# Altium PCB PCB.PcbDoc
Units mm, origin at the board's own origin, x right, y up, seen from the top; angles counter-clockwise.
Board outline 52 x 43.5 mm, 4 copper layers (Top Copper, Signal Layer 1, Signal Layer 2, Bottom Copper), stack 1.57 mm thick; 27 components, 30 nets, 106 pads, 313 vias.
Unrouted connection lines stored in the file: 5.
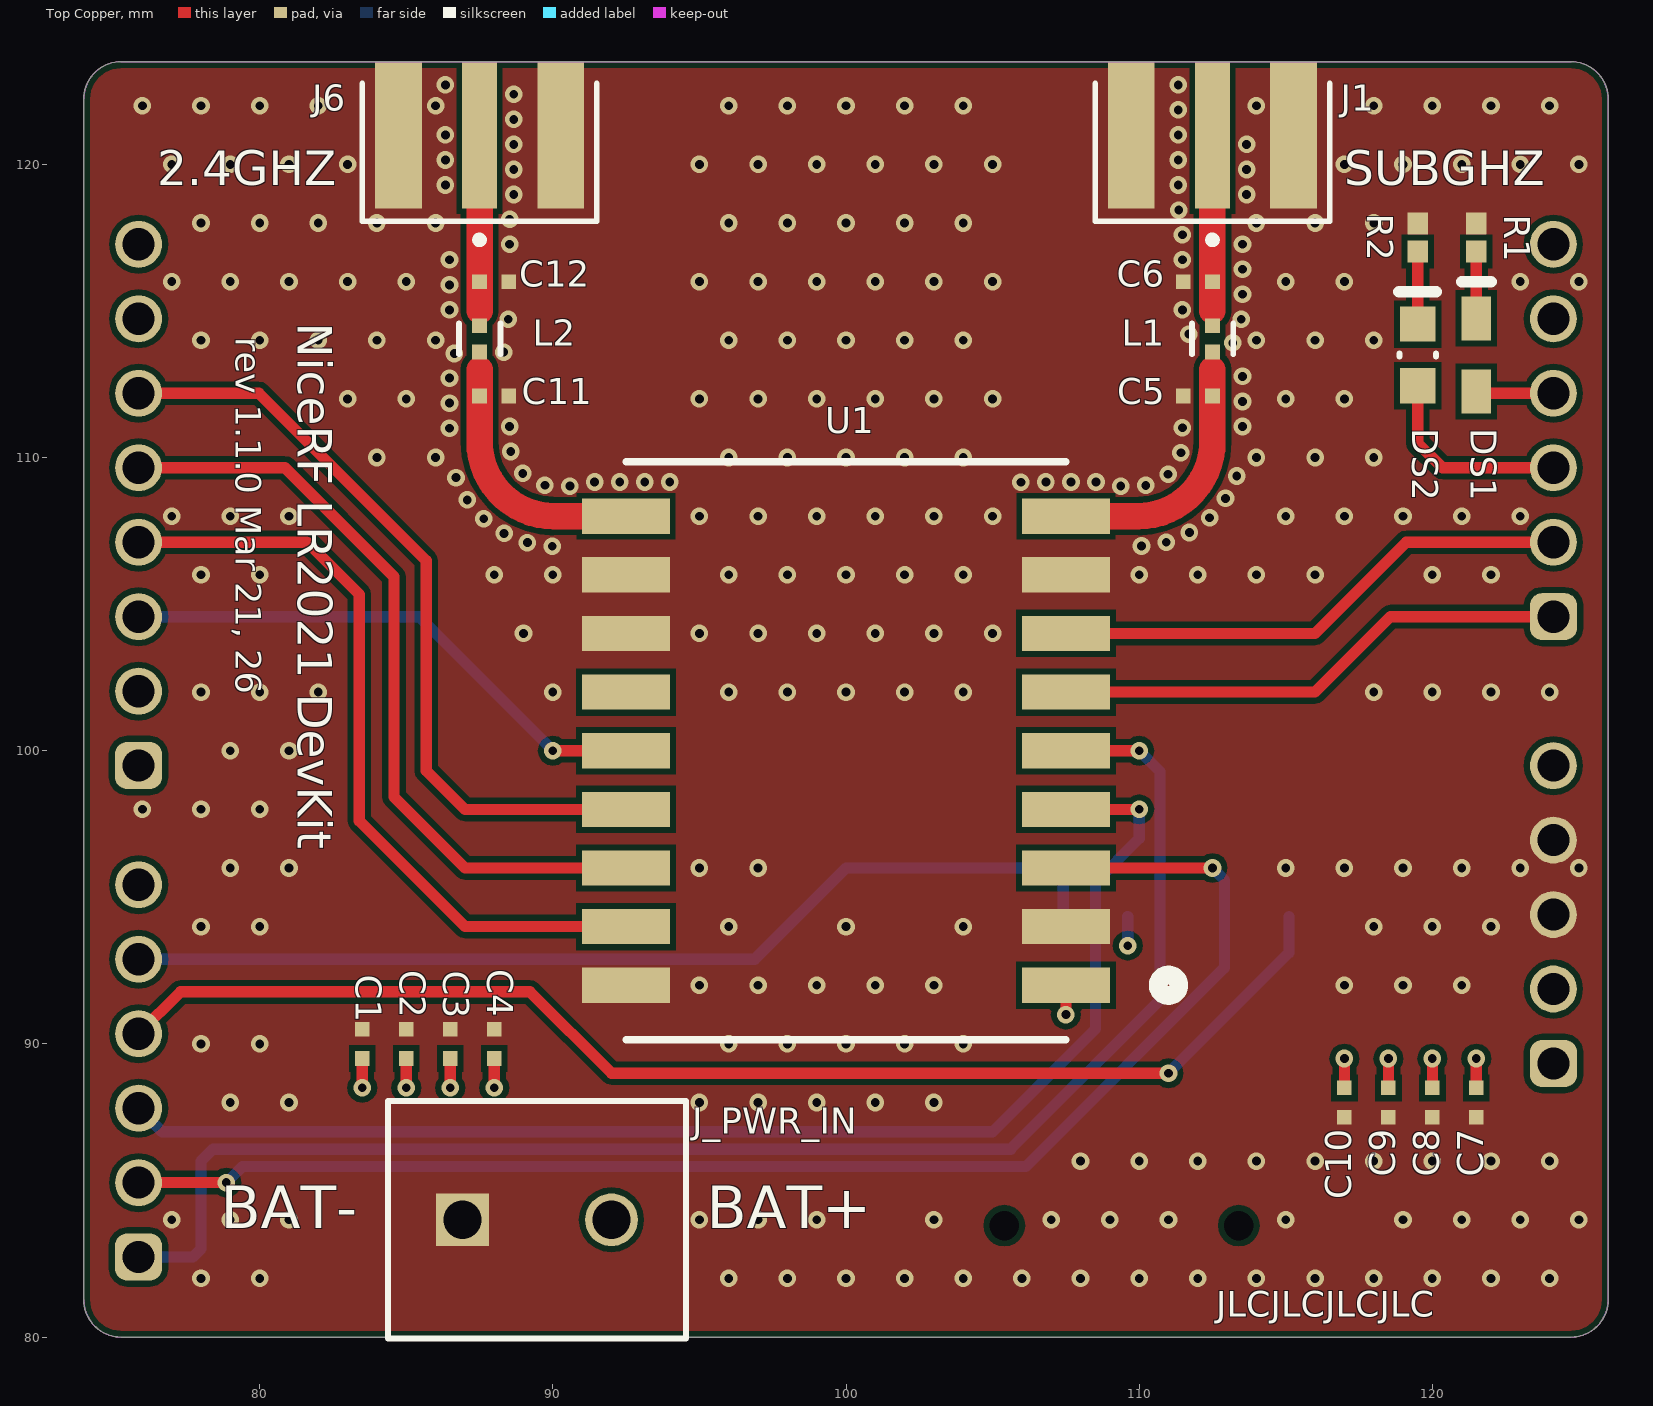
[diagram p0: Top Copper view]
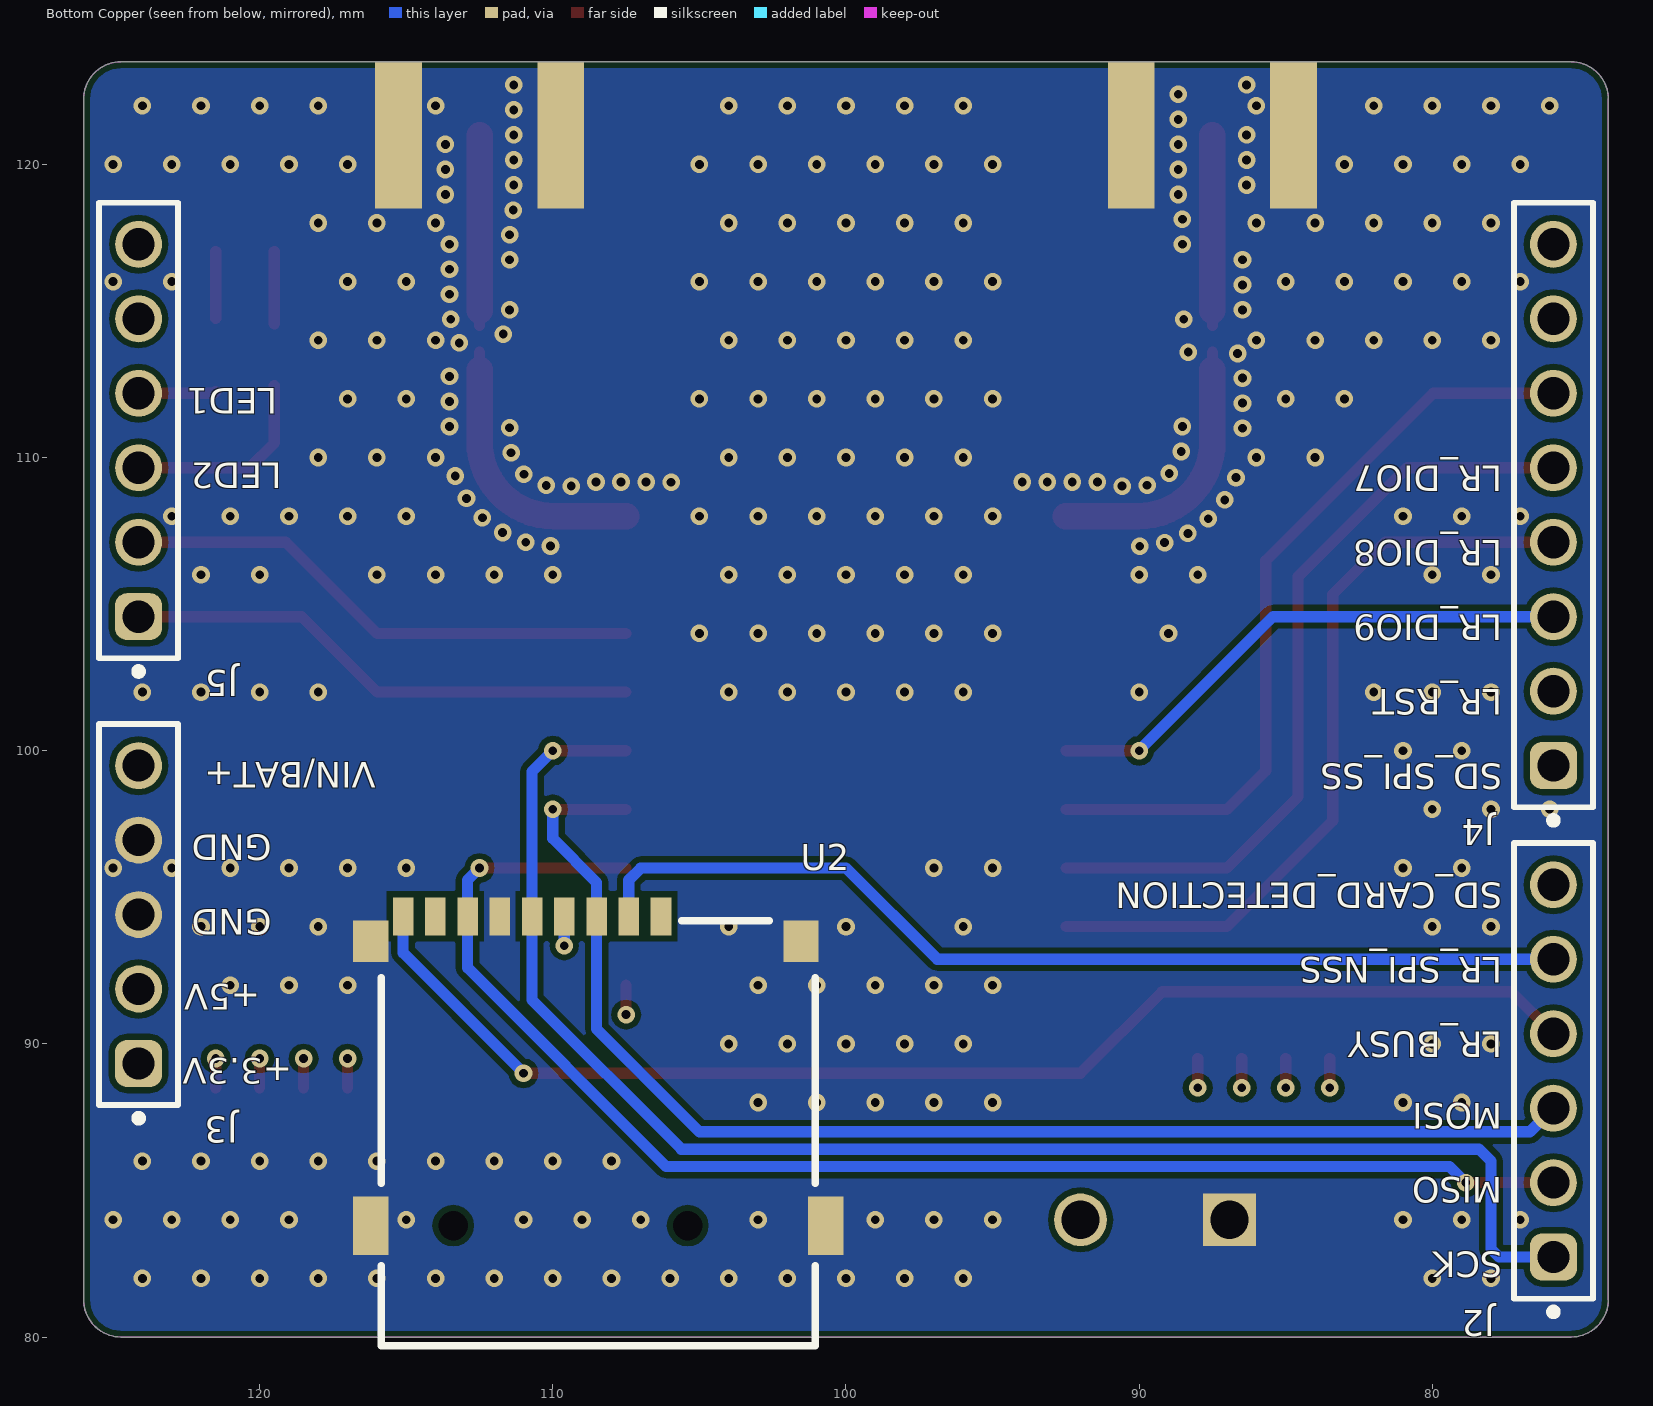
[diagram p1: Bottom Copper view, seen from below]
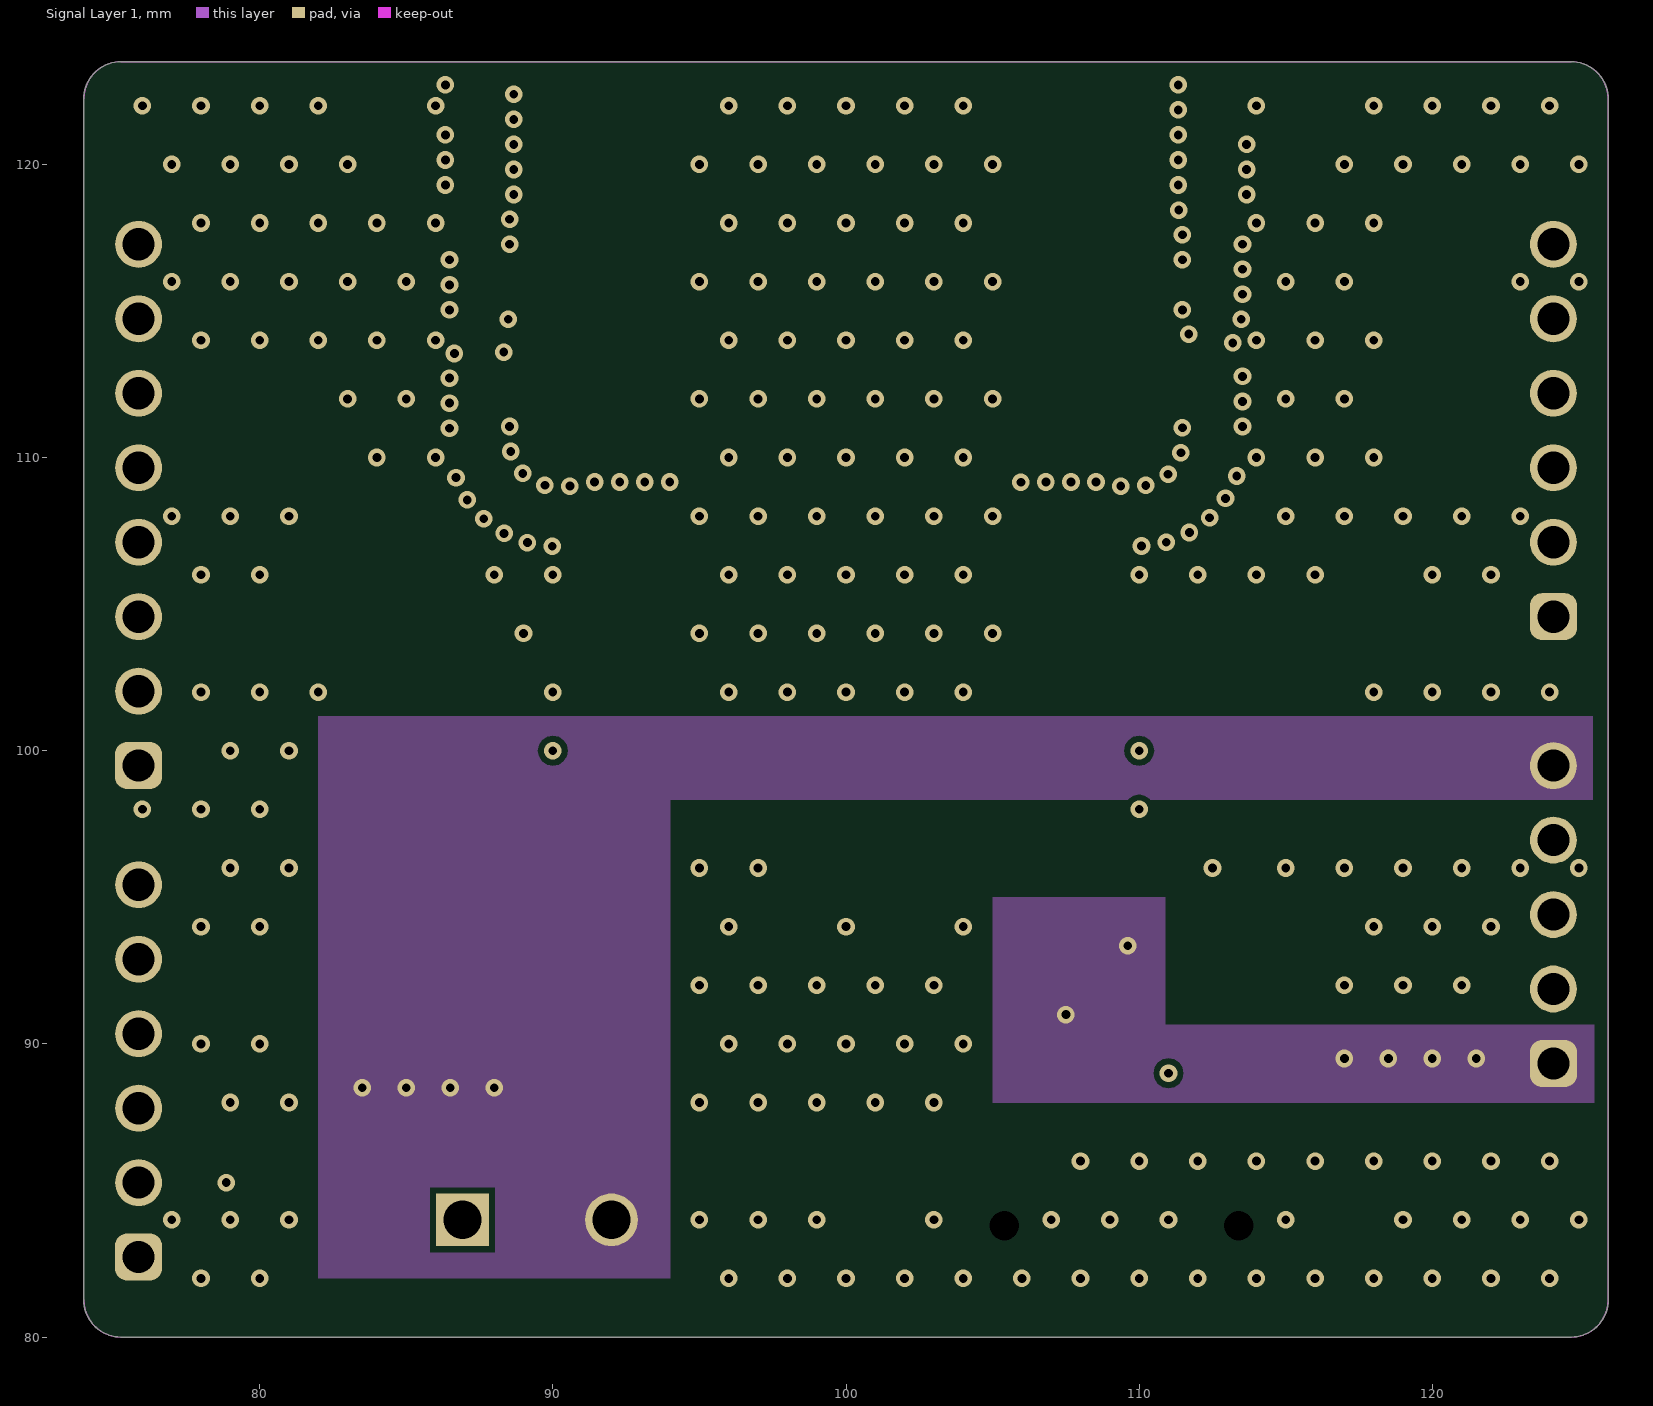
[diagram p2: Signal Layer 1]
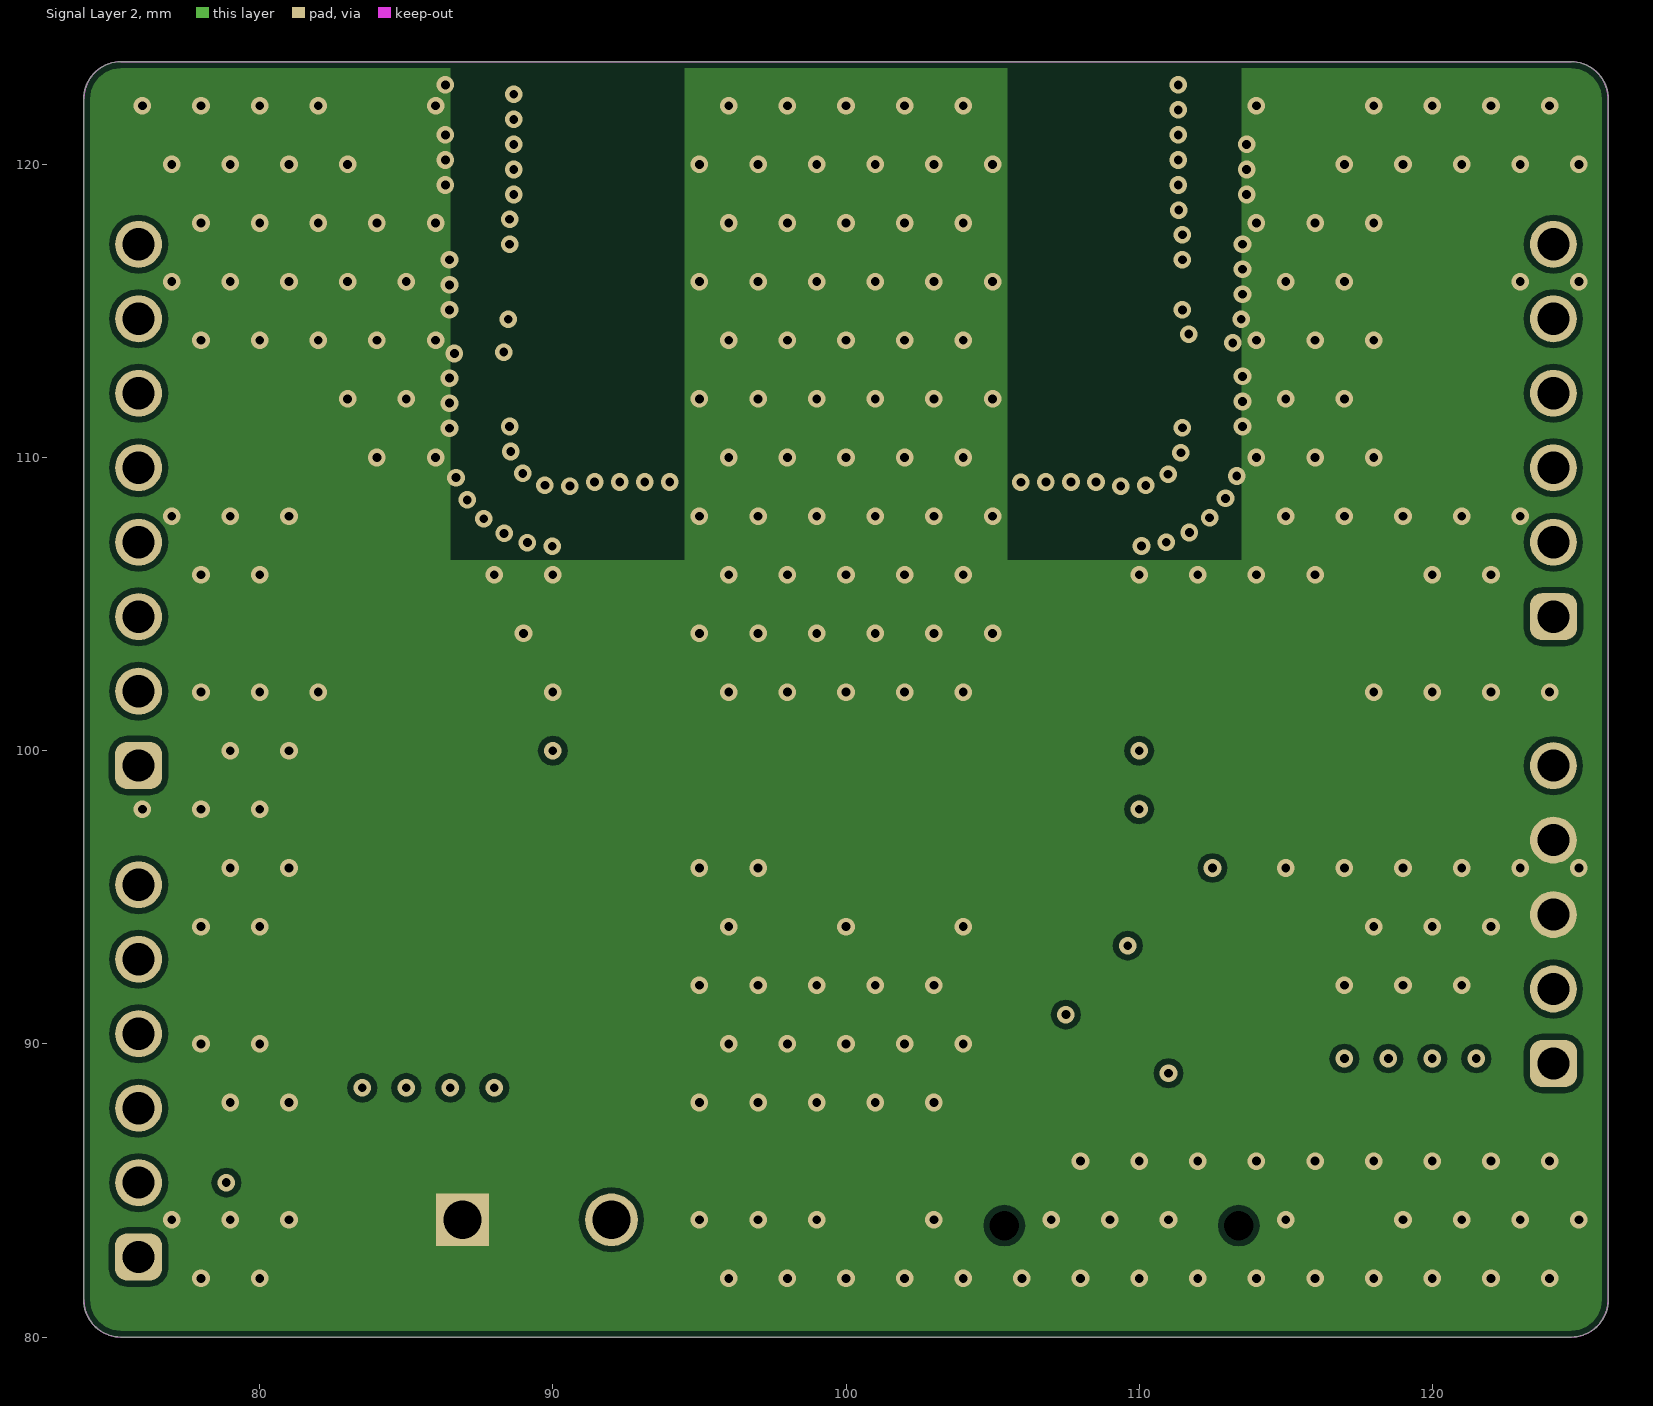
[diagram p3: Signal Layer 2]
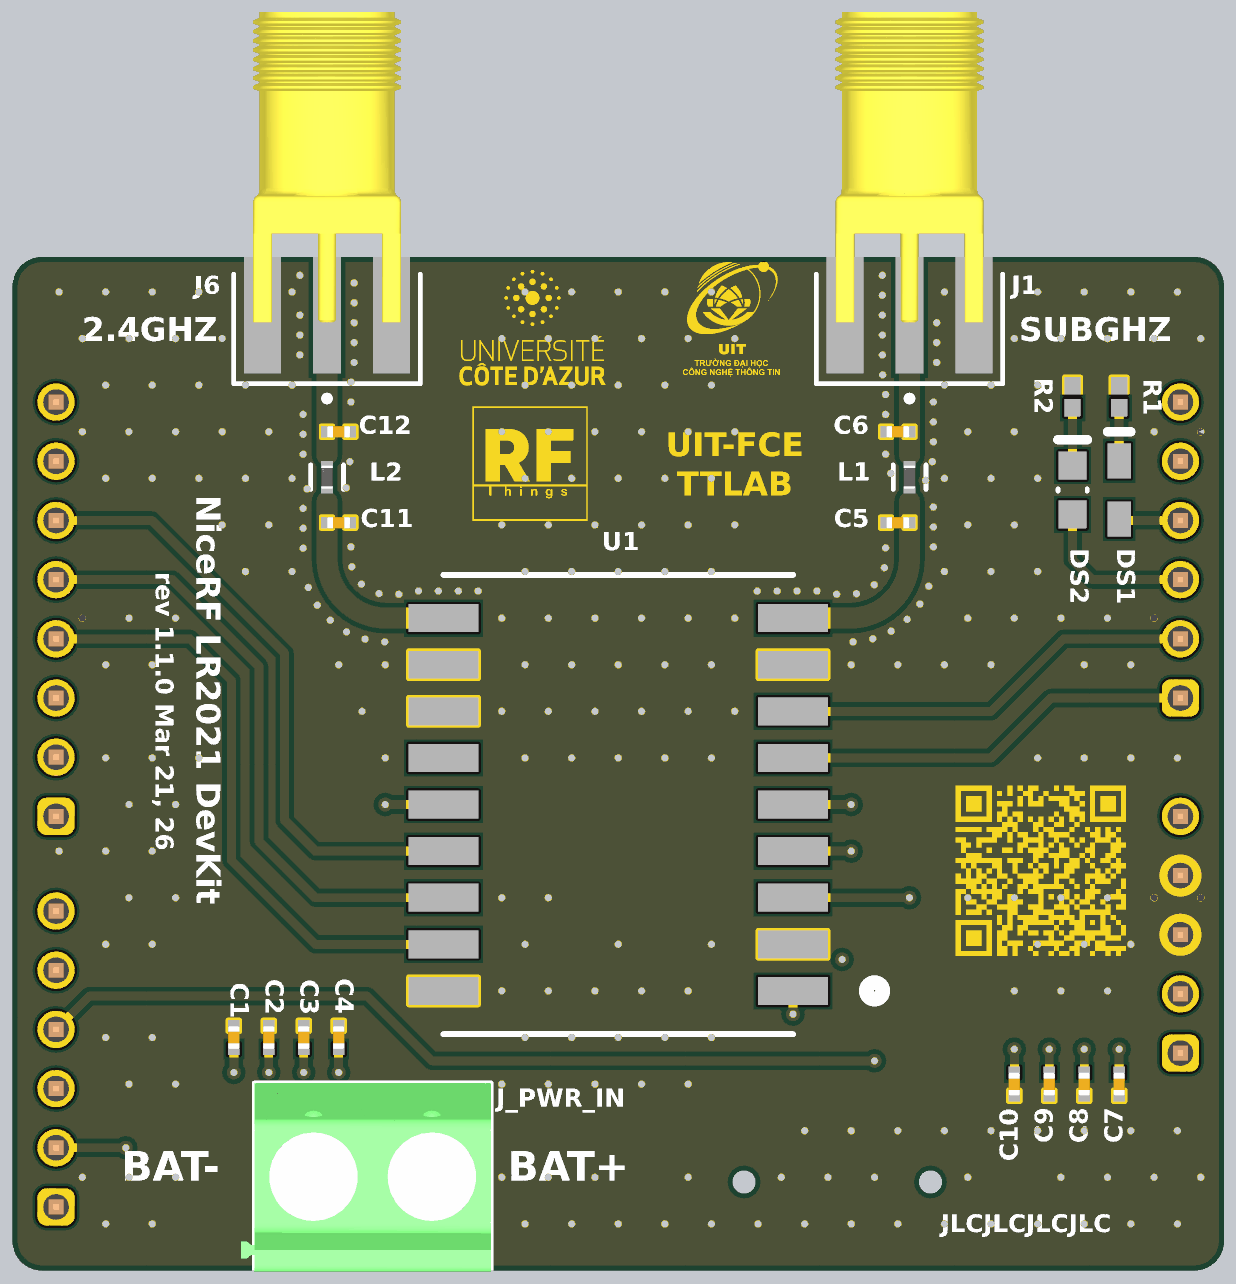
[diagram p4: 3D render of the assembled board from above, using the file's embedded part models]
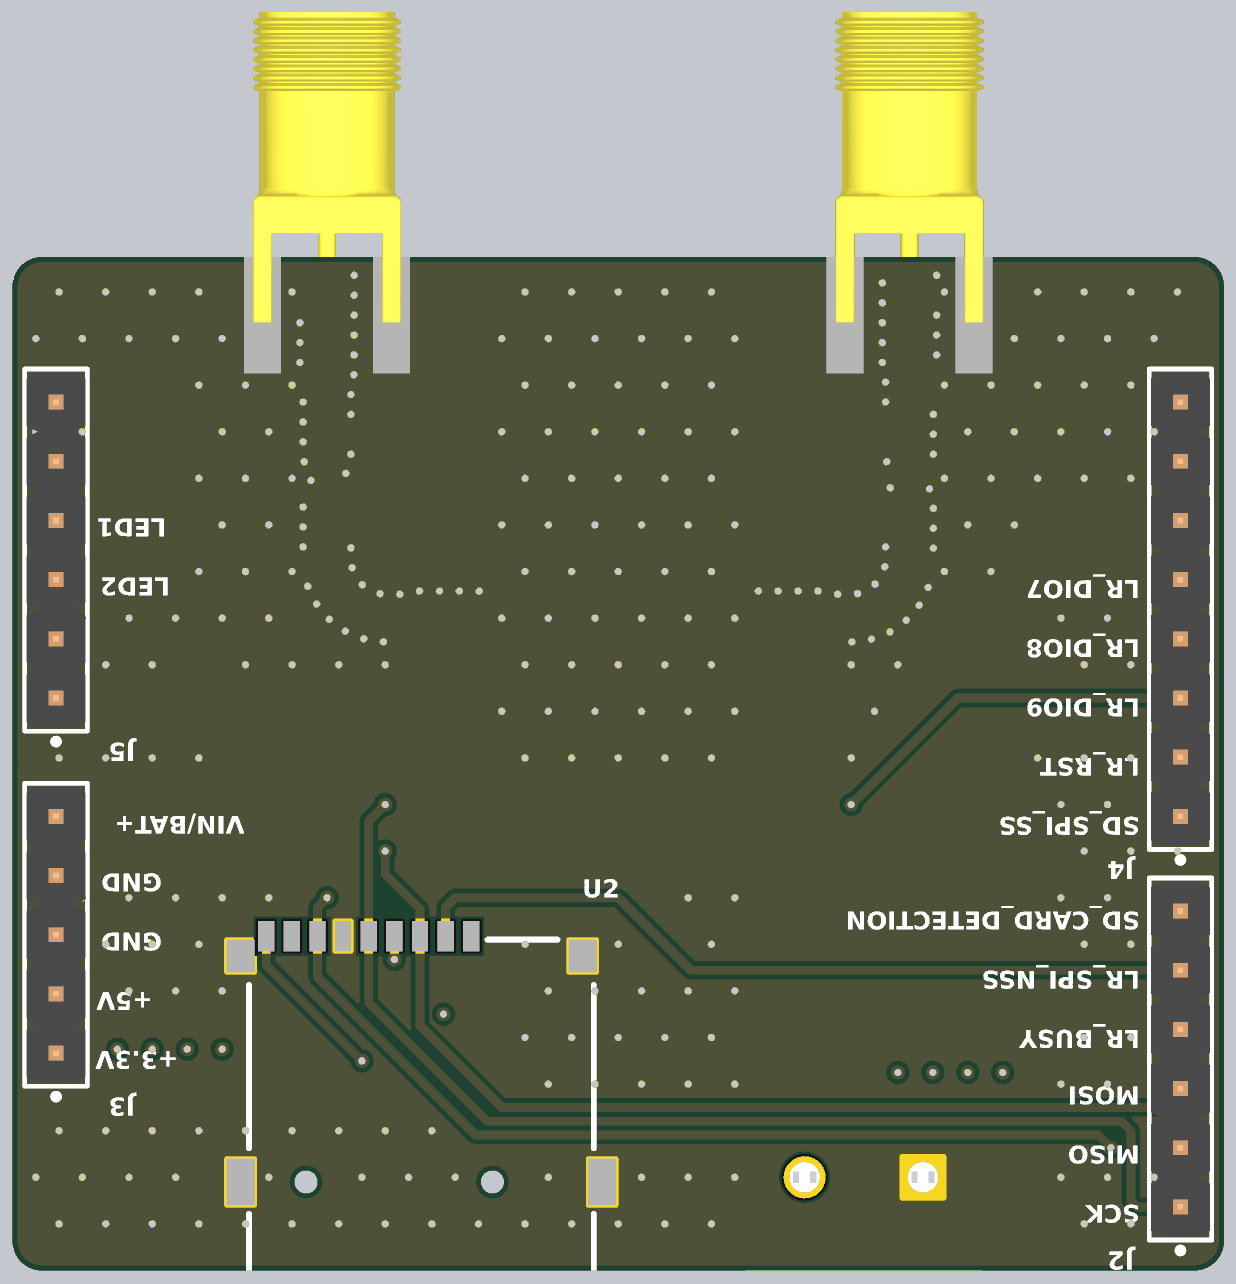
[diagram p5: 3D render of the assembled board from below, using the file's embedded part models]

## Layer stack, top to bottom
Top Mask: solder mask 0.015, Solder Resist, Dk 3.8
Top Copper: signal copper 0.035
Dielectric 1: prepreg 0.2, 7628, Dk 4.6
Signal Layer 1: signal copper 0.0175
Core: core 1.065, FR-4, Dk 4.5
Signal Layer 2: signal copper 0.0175
Dielectric 2: prepreg 0.2, 7628, Dk 4.6
Bottom Copper: signal copper 0.035
Bottom Mask: solder mask 0.015, Solder Resist, Dk 3.8

## Board outline
75.27,80 cw(c75.27,81.27) 74,81.27 74,122.23 cw(c75.27,122.23) 75.27,123.5 124.73,123.5 cw(c124.73,122.23) 126,122.23 126,81.27 cw(c124.73,81.27) 124.73,80

## Design rules (kind name [scope] priority, off if disabled: settings)
BoardOutlineClearance [All] p1: gap=0.2 ignorepadtopadclearanceinfootprint=FALSE except(0.4: Arc-SplitBarrior Arc-SplitContinuation Track-SplitBarrior Track-SplitContinuation SMDPad-SplitBarrior SMDPad-SplitContinuation THPad-SplitBarrior THPad-SplitContinuation Via-SplitBarrior Via-SplitContinuation Fill-SplitBarrior Fill-SplitContinuation Poly-SplitBarrior Poly-SplitContinuation Region-SplitBarrior Region-SplitContinuation Text-SplitBarrior Text-SplitContinuation)
Clearance [All] p1: gap=0.2 ignorepadtopadclearanceinfootprint=FALSE except(0.089: Arc-Arc Arc-Track Arc-SMDPad Track-Track Track-SMDPad SMDPad-SMDPad; 0.127: Arc-Via Track-Via SMDPad-Via THPad-Via Via-Via; 0.254: Arc-Text Track-Text SMDPad-Text THPad-Text Via-Text Fill-Text Poly-Text Region-Text Text-Text)
HoleSize [All] p1: absolutevalues=TRUE maxlimit=6.3 minlimit=0.2 maxpercent=80.000 minpercent=20.000
MinimumAnnularRing [All] p1: minimumring=0.076
MinimumSolderMaskSliver [All] p1: minsoldermaskwidth=0.1
PolygonConnect PolygonConnect_1 [All] p1: connectstyle=Direct reliefconductorwidth=0.508 reliefentries=4 polygonreliefangle="90 Angle" airgapwidth=0.254
RoutingCorners [All] p1: cornerstyle=Round minsetback=2.54 maxsetback=2.54
RoutingVias [All] p1: holewidth=0.5 width=1 viastyle="Through Hole" minholewidth=0.2 minwidth=0.45 maxholewidth=1 maxwidth=2
SilkToSilkClearance [All] p1: silktosilkclearance=0.1
SilkToSolderMaskClearance [IsPad] p1: minsilkscreentomaskgap=0.1 clearancetoexposedcopper=TRUE
SolderMaskExpansion [All] p1: expansion=0.102 istentingtop=FALSE
SupplyNets "Schematic Supply Nets_3" [InNet('+5V')] p1: voltage=0.000
SupplyNets "Schematic Supply Nets_2" [InNet('VIN')] p2: voltage=0.000
SupplyNets "Schematic Supply Nets_1" [InNet('GND')] p3: voltage=0.000
SupplyNets "Schematic Supply Nets" [InNet('+3.3V')] p4: voltage=0.000
Width [All] p1: maxlimit=2.54 minlimit=0.089 preferedwidth=0.381
25 further rules are at their usual default settings.

## Components (designator, comment, footprint, x,y, rotation, side; value= is the part's Value field where it differs from the comment)
C1 "885012205037" WCAP-CSGP_0402_L1W0.5H0.5 83.5,90 r270 top
C2 "885012205037" WCAP-CSGP_0402_L1W0.5H0.5 85,90 r270 top
C3 "885012205037" WCAP-CSGP_0402_L1W0.5H0.5 86.5,90 r270 top
C4 "885012205037" WCAP-CSGP_0402_L1W0.5H0.5 88,90 r270 top
C5 "885012205037" WCAP-CSGP_0402_L1W0.5H0.5 112,112.1 r0 top
C6 "885012205037" WCAP-CSGP_0402_L1W0.5H0.5 112,116 r0 top
C7 "885012205037" WCAP-CSGP_0402_L1W0.5H0.5 121.5,88 r90 top
C8 "885012205037" WCAP-CSGP_0402_L1W0.5H0.5 120,88 r90 top
C9 "885012205037" WCAP-CSGP_0402_L1W0.5H0.5 118.5,88 r90 top
C10 "885012205037" WCAP-CSGP_0402_L1W0.5H0.5 117,88 r90 top
C11 "885012205037" WCAP-CSGP_0402_L1W0.5H0.5 88,112.1 r180 top
C12 "885012205037" WCAP-CSGP_0402_L1W0.5H0.5 88,116 r180 top
DS1 "LTST-S220GKT" LTST-S220GKT_V 121.5,113.5 r90 top
DS2 "LTST-C170KRKT" LTST-C170KRKT_V 119.5,113.5 r90 top
J1 "CON-SMA-EDGE-S" FP-CON-SMA-EDGE-S-MFG 112.5,128.26 r0 top
J2 "61300611121" 61300611121 75.87,89.078 r90 bottom
J3 "61300511121" 61300511121 124.13,94.412 r90 bottom
J4 "61300811121" 61300811121 75.87,108.382 r90 bottom
J5 "61300611121" 61300611121 124.13,110.922 r90 bottom
J6 "CON-SMA-EDGE-S" FP-CON-SMA-EDGE-S-MFG 87.5,128.26 r0 top
J_PWR_IN "1729128" PHOE-1729128-2_V 89.46,84 r0 top
L1 "MLZ1005M1R0WT000" FP-MLZ1005-MFG 112.5,114.05 r90 top
L2 "MLZ1005M1R0WT000" FP-MLZ1005-MFG 87.5,114.05 r90 top
R1 "RT0402DRE071KL" RESC1005X35X25ML10T10 121.5,117.5 r270 top
R2 "RT0402DRE071KL" RESC1005X35X25ML10T10 119.5,117.5 r270 top
U1 "LoRa Module" LR2021 100,100 r180 top
U2 "MicroSD Slot" TF-01A 115.11,95 r180 bottom

## Footprints (in the part's own frame and the unit in brackets; to place one, negate y for a bottom-side part, rotate by r counter-clockwise, add the part's x,y. Pads: shape width x height; smd on the part's side, far side on the other; paste and mask are expansions set on the pad)
61300511121 [mm] "Pin Header, pitch 2.54 mm, THT, Vertical, single row, 5p"
  rrect50% 1.6x1.6 hole 1.1: 1(-5.08,0)
  round 1.6 hole 1.1: 2(-2.54,0) 3(0,0) 4(2.54,0) 5(5.08,0)
  silkscreen extent -7.07,-1.35 6.5,1.35, body extent -6.35,-1.27 6.35,1.27, height 8.57
61300611121 [mm] "Pin Header, pitch 2.54 mm, THT, Vertical, single row, 6p"
  rrect50% 1.6x1.6 hole 1.1: 1(-6.35,0)
  round 1.6 hole 1.1: 2(-3.81,0) 3(-1.27,0) 4(1.27,0) 5(3.81,0) 6(6.35,0)
  silkscreen extent -8.34,-1.35 7.77,1.35, body extent -7.62,-1.27 7.62,1.27, height 8.57
61300811121 [mm] "Pin Header, pitch 2.54 mm, THT, Vertical, single row, 8p"
  rrect50% 1.6x1.6 hole 1.1: 1(-8.89,0)
  round 1.6 hole 1.1: 2(-6.35,0) 3(-3.81,0) 4(-1.27,0) 5(1.27,0) 6(3.81,0) 7(6.35,0) 8(8.89,0)
  silkscreen extent -10.88,-1.35 10.31,1.35, body extent -10.16,-1.27 10.16,1.27, height 8.57
FP-CON-SMA-EDGE-S-MFG [mm]
  rect 1.2x5 smd paste+0 mask+0: 1(0,-7.26)
  rect 1.6x5 smd paste+0 mask+0: 2(-2.77,-7.26) 3(2.77,-7.26)
  rect 1.6x5 smd far side paste+0 mask+0: 4(-2.77,-7.26) 5(2.77,-7.26)
  silkscreen extent -4,-10.96 4,-5.5, body extent -3.67,-9.86 3.67,4.86, height 0.25
FP-MLZ1005-MFG [mm]
  rect 0.5x0.5 smd paste+0 mask+0: 1(-0.45,0) 2(0.45,0)
  silkscreen extent -0.53,-0.71 0.53,0.7, body extent -0.8,-0.38 0.8,0.38, height 0.25
LR2021 [mm] "LoRa2021: 160mW Multi-Band Wireless Communication Module"
  rect 3x1.2 smd: 1(-7.5,8) 2(-7.5,6) 3(-7.5,4) 4(-7.5,2) 5(-7.5,0) 6(-7.5,-2) 7(-7.5,-4) 8(-7.5,-6) 9(-7.5,-8) 10(7.5,-8) 11(7.5,-6) 12(7.5,-4) 13(7.5,-2) 14(7.5,0) 15(7.5,2) 16(7.5,4) 17(7.5,6) 18(7.5,8)
  silkscreen extent -11.35,-9.86 7.5,9.86
LTST-C170KRKT_V [mm] "SMD, 2-Leads, Body 2x1.25mm"
  rect 1.2x1.2 smd: 1(-1.05,0) 2(1.05,0)
  silkscreen extent -0.05,-0.63 2.16,0.64, body extent -1,-0.63 1,0.63, height 1.2
LTST-S220GKT_V [mm] "SMD, 2-Leads, Body 2.1x0.6mm"
  rect 1.5x1 smd: 1(-1.25,0) 2(1.25,0)
  silkscreen extent 2.5,-0.5 2.5,0.5, body extent -1.05,-0.3 1.05,0.3, height 1.1
PHOE-1729128-2_V [mm] "Receptacle, 2-Leads, Body 8.1x10.16mm, Pitch 5.08mm"
  rect 1.8x1.8 hole 1.3: 1(-2.54,0)
  round 1.8 hole 1.3: 2(2.54,0)
  silkscreen extent -5.08,-4.05 5.08,4.05, body extent -5.65,-4.05 5.08,4.05, height 10.01
RESC1005X35X25ML10T10 [mm] "Chip Resistor, 2-Leads, Body 1.00x0.50mm, IPC Low Density"
  rect 0.75x0.7 smd: 1(-0.475,0) 2(0.475,0)
  body extent -0.55,-0.3 0.55,0.3, height 0.35
TF-01A [mm]
  rect 0.7x1.3 smd: 1(8.8,-0.65) 2(7.7,-0.65) 3(6.6,-0.65) 4(5.5,-0.65) 5(4.4,-0.65) 6(3.3,-0.65) 7(2.2,-0.65) 8(1.1,-0.65) 9(0,-0.65)
  rect 1.2x1.4 smd: 10(-1.1,-1.5) 13(13.58,-1.5)
  rect 1.2x2 smd: 11(-1.1,-11.2) 12(14.42,-11.2)
  rect 0x0 hole 1 unplated: 14(1.71,-11.2) 15(9.71,-11.2)
  silkscreen extent -0.74,-15.3 14.06,-0.8
WCAP-CSGP_0402_L1W0.5H0.5 [mm] "Ceramic Capacitors, body 1x0.5mm"
  rect 0.5x0.5 smd: 1(-0.5,0) 2(0.5,0)
  body extent -0.5,-0.25 0.5,0.25, height 0.5

## Part data
C1 C2 C3 C4 C5 C6 C7 C8 C9 C10 C11 C12: library part CMP-207839-000001-3, "Cap Ceramic 0.1uF 16V X7R 10% Pad SMD 0402 125C T/R", Capacitance=100nF, Case Code (Imperial)=0402, Case Code (Metric)=1005, Dielectric=X7R, Insulation Resistance=5GΩ, Max Operating Temperature=125°C, Min Operating Temperature=-55°C, Tolerance=10%, Voltage Rating=16V, Case/Package=0402, Height=500µm, Length=1mm, Material=Ceramic, Mount="Surface Mount", REACH SVHC=Unknown, RoHS=Compliant, Thickness=558.8µm, Voltage Rating (DC)=16V, Width=500µm
DS1: library part CMP-2000-06627-1, "LED Green, 100 mW, 30 mA, -55 to 85 degC, 2-Pin SMD, RoHS, Tape and Reel", Emitting Color=YellowGreen, Forward Current=30mA, Forward Voltage=2.6V, Manufacturer=Lite-On, Operating Temp Range=-55Cto85C, Operating Temperature Classification=Industrial, Package Description="2-Pin Surface Mount Device, Body 2.1 x 0.6 mm", Package Reference=S220GKT, Package Type=SMD, Power Dissipation=100W, Reverse Voltage=5V, Test Current (It)=20mA, Datasheet URL=http://media.digikey.com/pdf/Data%20Sheets/Lite-On%20PDFs/LTST-S220GKT.pdf, Datasheet Version=03/2000, DELETED=Compliant, Dominant Wave Length=569nm, High Brightness=No, Lens Dimensions=1.7x0.6x0.5mm, Lum Intensity=20mcd, Luminous Intensity=20mcd, Main Category=ChipLED, Manufacturer URL=http://www.us.liteon.com/, Mounting=SurfaceMount, Mounting Technology=SurfaceMount, Number of  Elements=1, Packaging=TapeandReel, Peak Wavelength=565nm, Pin Count=2, Product Depth (mm)=0.6mm, Product Height (mm)=1mm, Product Length (mm)=2.1mm, Rad Hardened=No, Shape Type=Rectangular, Type=Uni-Color, Viewing Angle=130deg
DS2: library part CMP-2000-07593-1, "LED Red, 75 mW, 54 mcd, -55 to 85 degC, 2-Pin SMD, RoHS, Tape and Reel", Case Code (Imperial)=0805, Case Code (Metric)=2012, Colour=Red, Forward Current=30mA, Forward Voltage=2V, Lens Colour=Colorless, Manufacturer=Lite-On, Max Operating Temperature=85degC, Min Operating Temperature=-55degC, Package Description="2-Pin Surface Mount Device, Body 2 x 1.25 mm", Package Quantity=1, Package Reference=C170KRKT, Power Dissipation=75mW, Test Current=20mA, Case\/Package=0805, Datasheet URL=http://optoelectronics.liteon.com/upload/download/DS-22-99-0150/LTST-C170KRKT.pdf, Datasheet Version="Rev. D, 11/2014", Depth=1.6mm, Dominant Wavelength=631nm, Height=1.1mm, Illumination Colour=Red, Lead Free=LeadFree, Length=3.2mm, Lens Style=Rectangular, Lens Transparency=Clear, Luminous Intensity=54mcd, Manufacturer URL=http://www.us.liteon.com/, Mount=SurfaceMount, Mounting Technology=SurfaceMount, Number of Elements=1, Number of LEDs=1, Number of Pins=2, Packaging=TapeandReel, Power Rating=75mW, Radiation Hardening=No, RoHSCompliant=True, Viewing Angle=130degrees, Wavelength=639nm, Width=1.25mm
J1 J6: library part CMP-204357-000001-1, "CONN SMA JACK STR EDGE MNT", Frequency=18GHz, Manufacturer="RF Solutions Ltd.", Package=CONN_JACK, Automotive=No, Category=Conn, ComponentLink2Description=Datasheet, ComponentLink2URL=https://www.rfsolutions.co.uk/downloads/1498648656DS-CON-EDGE-SMA-4.pdf, Conn Orientation="Right Angle", Contact Material=Gold, Device Class L1=Connectors, Device Class L2="RF / Coaxial Connectors", Device Class L3=unset, Digikey Description="CONN SMA JACK STR EDGE MNT", Footprint Url=https://forum.upverter.com/uploads/default/original/3X/b/e/be75b907af57498775929d6d9099689c472e0307.pdf, Height=6.35mm, Impedance=50Ω, Is Female=yes, Lead Free=Yes, Manufacturer Part Number=CON-SMA-EDGE-S, Number Of Contacts=1, Octopart=https://octopart.com/con-sma-edge-s-rf+solutions-70967450, RoHS=TRUE, Shielding=true
J2 J5: library part CMP-1502-01070-4, "THT Vertical Pin Header WR-PHD, Pitch 2.54 mm, Single Row, 6 pins", Color=Black, Contact Resistance=20mΩ, Current Rating=3A, Max Operating Temperature=105°C, Min Operating Temperature=-40°C, Operating Supply Voltage=250V, Connector Type="Male Pin", Contact Gender=Male, Contact Material=Gold, Contact Mating Length=5.9944mm, Contact Plating=Gold, Gender=Male, Height=8.89mm, Housing Material=PBT, Lead Free="Lead Free", Lead Pitch=2.54mm, Mount="Through Hole", Number Of Contacts=6, Number of Pins=6, Number of Positions=6, Number of Rows=1, Orientation=Vertical, Packaging=Bulk, Pitch=2.54mm, RoHS=Compliant, Termination="Through Hole", Voltage Rating=250V
J3: library part CMP-1502-01068-4, "THT Vertical Pin Header WR-PHD, Pitch 2.54 mm, Single Row, 5 pins", Color=Black, Contact Resistance=20mΩ, Current Rating=3A, Max Operating Temperature=105°C, Min Operating Temperature=-40°C, Operating Supply Voltage=250V, Connector Type="Male Pin", Contact Material=Gold, Contact Mating Length=5.9944mm, Contact Plating=Gold, Gender=Male, Height=8.89mm, Lead Free="Lead Free", Lead Pitch=2.54mm, Mount="Through Hole", Number Of Contacts=5, Number of Pins=5, Number of Positions=5, Number of Rows=1, Orientation=Vertical, Packaging=Bulk, Pitch=2.54mm, RoHS=Compliant, Termination=Solder, Voltage Rating=250V
J4: library part CMP-1502-01076-4, "THT Vertical Pin Header WR-PHD, Pitch 2.54 mm, Single Row, 8 pins", Color=Black, Contact Resistance=20mΩ, Current Rating=3A, Max Operating Temperature=105°C, Min Operating Temperature=-40°C, Operating Supply Voltage=250V, Connector Type="Male Pin", Contact Material=Gold, Contact Mating Length=5.9944mm, Contact Plating=Gold, Gender=Male, Height=8.54mm, Lead Pitch=2.54mm, Mount="Through Hole", Number Of Contacts=8, Number of Pins=8, Number of Positions=8, Number of Rows=1, Orientation=Vertical, Packaging=Bulk, Pitch=2.54mm, RoHS=Compliant, Termination=Solder, Voltage Rating=250V
J_PWR_IN: library part CMP-2000-05815-1, "PCB Terminal Block, 13.5 A, 400 V, 2-Pin THD, RoHS, Bulk", Current Rating=13500mA, Manufacturer="Phoenix Contact", Package Description="2-Pin Through Hole Device, Body 8.1 x 10.16 mm, Pitch 5.08 mm", Package Reference=1729128-2, Package Version=03/2015, Voltage Rating=400V, Datasheet URL=https://datasheet.ciiva.com/16046/1729128-16046181.pdf, Datasheet Version=12/2013, Manufacturer URL=http://www.phoenixcontact.com/, Mounting Technology=ThroughHole, No. of Positions=2, No. of Rows=1, Orientation=Horizontal, Package URL=https://www.phoenixcontact.com/online/portal/pi/pxc/product_detail_page/!ut/p/b1/3VdJjqNKFDxLH8AFycySyWY2ozFsEPOMMQaDOX1XedGL_1Vdm5YXJleknhSKeBkvI6EA8ncAo3AYoDhBQGco6KN7VURTdemj9us_IEKEZo_YHiPAEWEFmDGOHMORkqKYCORBZxgL7ZoaZYcbFFUZ3fqxSY6GOuxydWUuHqz1ynmMFygu583Bob0Ewr6Sd_l-5m-kAueHiB0jpRwZwe58wwtkpxtMYd_LmGcDRU02dRNEyWt6Y2ti5pSyJ_reIkzIulrqApdnbT11V5jnCKbYNCvhEM1MCpPByat_X379-iThf08CI5GfOPqfBeS3BRoBOdD55AKVv0iLwCMq-2BrzXWSGRH7pUGD9uwXQjiph3xL0DKQwdGa0JImiIOmBNOestqgwTHSSs2oOep-78apyXQBvNi8ZLaFjvjWvcaUEBu0MC6Wbe-d6mB0FAebo2lUWinqYaZs5DAYzV0RP9yitUjnGJ0iI9xhZkT42OCQNUJJhkgWINNQLP2JFP6OpMg3JCVg70jqHT0lvKOnhHf0lPuOnnLf0VPuWx6_dxwUIvwk5WMkT0kLL1mh61l2yZVSzG3pYV_bqo-mj6uMKwKwdnnW8Jh5RTOJzMOA5c-eJDaZQw4mTMPH02PvS_ZAqNVjVTo2WyYLkwH_KU1mmmG5kjRhDqPXLwwVHvVOjCM60-fpXvTDfMGW1PVFVS1r4e4yVDk4ZdNbkUHvqPqQSeian4UD39fNKmachqdJ1NJbyk8rXT9mXTvPk3oE5meulKGgiruPJek-4I9hTT6G8ZLOyRSm2RRVbThERQad5OS28hdt4YW4vG0stgYYzsWsK4_7y6DZMjJSCqri1kyiZR5vD7pwIrNR7QwPHTcLTI5qT7eRlpHrdGiupYlqQDJ7zy_CND8fWWBoLRXxk1RVcXiBQwbTD4Xi7KL-FuO94t9xaqweXzH, Packing=Bulk, PartNumber=1729128, Pitch=5.08mm, RoHS=TRUE
L1 L2: library part CMP-08253-000219-1, "Shielded Multilayer Inductor 1uH ±20% 450mA 455mΩ SMD 0402", Case Code (Imperial)=0402, Case Code (Metric)=1005, Current Rating=450mA, DC Resistance (DCR)=455mR, Inductance=1uH, Max Operating Temperature=125°C, Min Operating Temperature=-55°C, Package Quantity=10000, Saturation Current=100mA, Self Resonant Frequency=170MHz, Test Frequency=2MHz, Tolerance=20%, Case/Package=0402, Core Material=Ferrite, Height - Seated (Max)=0.022inch, Length=0.039inch, Mount="Surface Mount", Packaging="Tape and Reel", RoHS Compliant=Yes, Shielding=Shielded, Width=0.02inch
R1 R2: library part CMP-2002-02598-1, Manufacturer=Yageo, Part Number=RT0402DRE071KL
U1: library part LR2021, "LoRa2021: 160mW Multi-Band Wireless Communication Module"
U2: library part TF-01A, "1.85mm Card Slot MicroSD card (TF card) Self-bouncing SMD SD Card / Memory Card Connector ROHS"

## Via types
v1: diameter 0.6, hole 0.3, Top Copper to Bottom Copper, tented both sides, 313 vias

## Nets (pads, with @x,y where several pads share a name; then routed paths per layer and width w, separated by ;. In a path a pad name is that pad's centre, name@x,y a point inside that pad or via, vN(x,y) a via of type N, cw(c..) or ccw(c..) an arc to the next point about the centre after c; other vN are vias at no path point)
2.4GHZ_ANT: C11.2 L2.1 U1.10 | length 10.4
  Top Copper w0.381: C11.2 L2.1
  Top Copper w0.904: 87.5,113 87.5,110.54 ccw(c90.04,110.54) 90.04,108 U1.10
+3.3V: C7.2 C8.2 C9.2 C10.2 J3.1 U1.1 U2.4 | length 6
  Top Copper w0.381: v1(107.5,91) U1.1 ; C10.2 v1(117,89.5) ; C9.2 v1(118.5,89.5) ; C8.2 v1(120,89.5) ; C7.2 v1(121.5,89.5)
  Bottom Copper w0.381: v1(109.61,93.35) U2.4
+5V: J3.2
ADR_A0: J5.1 U1.6 | length 17.7
  Top Copper w0.381: U1.6 116,102 118.572,104.572 J5.1
ADR_A1: J5.2 U1.7 | length 17.9
  Top Copper w0.381: U1.7 116,104 119.112,107.112 J5.2
ADR_A2: DS2.1 J5.3 | length 6.9
  Top Copper w0.381: DS2.1 119.5,110.5 120.348,109.652 J5.3
ADR_A3: DS1.1 J5.4 | length 2.7
  Top Copper w0.381: DS1.1 121.558,112.192 J5.4
ADR_A4: J5.5
ADR_A5: J5.6
ADR_D0: J4.8
ADR_D1: J4.7
ADR_D2: J4.6 U1.15 | length 26.7
  Top Copper w0.381: J4.6 79.975,112.192 85.681,106.486 85.681,99.319 87,98 U1.15
ADR_D3: J4.5 U1.16 | length 26.7
  Top Copper w0.381: J4.5 80.862,109.652 84.581,105.933 84.581,98.419 87,96 U1.16
ADR_D4: J4.4 U1.17 | length 26.6
  Top Copper w0.381: J4.4 81.614,107.112 83.398,105.328 83.398,97.602 87,94 U1.17
ADR_D5: J4.3 U1.14 | length 18.5
  Top Copper w0.381: v1(90,100) U1.14
  Bottom Copper w0.381: J4.3 85.428,104.572 v1(90,100)
ADR_D6: J4.2
ADR_D7: J4.1
ADR_D8: J2.6
ADR_D9: J2.5 U2.2 | length 34.2
  Bottom Copper w0.381: J2.5 96.888,92.888 100,96 107,96 107.41,95.59 U2.2
ADR_D10: J2.4 U2.9 | length 43.9
  Top Copper w0.381: J2.4 77.297,91.775 89.225,91.775 92,89 v1(111,89)
  Bottom Copper w0.381: v1(111,89) 115.11,93.11 U2.9
ADR_D11: J2.3 U1.4 U2.3 | length 45
  Top Copper w0.381: U1.4 v1(110,98)
  Bottom Copper w0.381: J2.3 76.678,87 81,87 105,87 108.51,90.51 U2.3 108.51,95.51 110,97 v1(110,98)
ADR_D12: J2.2 U1.3 U2.7 | length 48.6
  Top Copper w0.381: J2.2 v1(78.863,85.268) ; U1.3 v1(112.5,96)
  Bottom Copper w0.381: v1(78.863,85.268) 79.417,85.823 106.134,85.823 112.91,92.598 112.91,93.35 U2.7 112.91,95.59 v1(112.5,96)
ADR_D13: J2.1 U1.5 U2.5 | length 51.5
  Top Copper w0.381: U1.5 v1(110,100)
  Bottom Copper w0.381: J2.1 77.728,82.728 78,83 78,86 78.407,86.407 105.618,86.407 110.71,91.499 110.71,93.35 U2.5 110.71,99.29 v1(110,100)
GND: C1.1 C2.1 C3.1 C4.1 C5.1 C6.1 C7.1 C8.1 C9.1 C10.1 C11.1 C12.1 J1.2 J1.3 J1.4 J1.5 J3.3 J3.4 J6.2 J6.3 J6.4 J6.5 J_PWR_IN.1 R1.1 R2.1 U1.2 U1.8 U1.11 U1.12 U1.18 U2.6 U2.10 U2.11 U2.12 U2.13
  other v1: 78,82 80,82 96,82 98,82 100,82 102,82 104,82 106,82 108,82 110,82 112,82 114,82 116,82 118,82 120,82 122,82 124,82 77,84 79,84 81,84 95,84 97,84 99,84 103,84 107,84 109,84 111,84 115,84 119,84 121,84 123,84 125,84 108,86 110,86 112,86 114,86 116,86 118,86 120,86 122,86 124,86 79,88 81,88 95,88 97,88 99,88 101,88 103,88 78,90 80,90 96,90 98,90 100,90 102,90 104,90 95,92 97,92 99,92 101,92 103,92 117,92 119,92 121,92 78,94 80,94 96,94 100,94 104,94 118,94 120,94 122,94 79,96 81,96 95,96 97,96 115,96 117,96 119,96 121,96 123,96 125,96 76,98 78,98 80,98 79,100 81,100 78,102 80,102 82,102 90,102 96,102 98,102 100,102 102,102 104,102 118,102 120,102 122,102 124,102 89,104 95,104 97,104 99,104 101,104 103,104 105,104 78,106 80,106 88,106 90,106 96,106 98,106 100,106 102,106 104,106 110,106 112,106 114,106 116,106 120,106 122,106 89.977,106.977 110.08,106.982 89.132,107.1 110.924,107.113 88.337,107.412 111.712,107.442 87.643,107.91 112.401,107.947 77,108 79,108 81,108 95,108 97,108 99,108 101,108 103,108 105,108 115,108 117,108 119,108 121,108 123,108 87.084,108.556 112.946,108.604 90.583,109.026 109.371,109.026 110.224,109.048 89.73,109.056 91.426,109.165 92.28,109.165 93.134,109.165 93.988,109.165 105.966,109.158 106.82,109.165 107.674,109.165 108.528,109.165 86.697,109.317 113.325,109.369 110.988,109.43 88.977,109.458 84,110 86,110 96,110 98,110 100,110 102,110 104,110 114,110 116,110 118,110 111.424,110.164 88.563,110.205 86.474,111.002 111.474,111.017 88.526,111.059 113.526,111.059 86.474,111.856 113.526,111.913 83,112 85,112 95,112 97,112 99,112 101,112 103,112 105,112 115,112 117,112 86.474,112.71 113.526,112.767 86.643,113.547 88.324,113.597 113.19,113.912 78,114 80,114 82,114 84,114 86,114 96,114 98,114 100,114 102,114 104,114 114,114 116,114 118,114 111.693,114.21 88.48,114.715 113.48,114.715 86.474,115.035 111.474,115.035 113.526,115.568 86.474,115.889 77,116 79,116 81,116 83,116 85,116 95,116 97,116 99,116 101,116 103,116 105,116 115,116 117,116 123,116 125,116 113.526,116.422 86.474,116.743 111.474,116.743 88.526,117.276 113.526,117.276 111.474,117.597 78,118 80,118 82,118 84,118 86,118 96,118 98,118 100,118 102,118 104,118 114,118 116,118 118,118 88.526,118.13 111.347,118.442 88.665,118.972 113.665,118.972 86.335,119.296 111.335,119.296 88.665,119.826 113.665,119.826 77,120 79,120 81,120 83,120 95,120 97,120 99,120 101,120 103,120 105,120 117,120 119,120 121,120 123,120 125,120 86.335,120.15 111.335,120.15 88.665,120.68 113.665,120.68 86.335,121.004 111.335,121.004 88.665,121.534 111.335,121.858 76,122 78,122 80,122 82,122 86,122 96,122 98,122 100,122 102,122 104,122 114,122 118,122 120,122 122,122 124,122 88.665,122.388 86.335,122.712 111.335,122.712
NetC6_2: C6.2 J1.1 L1.2 | length 7.5
  Top Copper w0.381: L1.2 C6.2
  Top Copper w0.904: 112.5,115 J1.1
NetC12_2: C12.2 J6.1 L2.2 | length 7.5
  Top Copper w0.381: L2.2 C12.2
  Top Copper w0.904: 87.5,115 J6.1
NetDS1_2: DS1.2 R1.2 | length 2.3
  Top Copper w0.381: DS1.2 R1.2
NetDS2_2: DS2.2 R2.2 | length 2.5
  Top Copper w0.381: DS2.2 R2.2
SUBGHZ_ANT: C5.2 L1.1 U1.9 | length 10.4
  Top Copper w0.381: C5.2 L1.1
  Top Copper w0.904: U1.9 109.96,108 ccw(c109.96,110.54) 112.5,110.54 112.5,113
VIN: C1.2 C2.2 C3.2 C4.2 J3.5 J_PWR_IN.2 | length 4
  Top Copper w0.381: v1(83.5,88.5) C1.2 ; v1(85,88.5) C2.2 ; v1(86.5,88.5) C3.2 ; v1(88,88.5) C4.2
pads on no net: U1.13 U2.1 U2.8 U2.14 U2.15

## Polygon pours and split planes (outlines as drawn)
+3.3V on Signal Layer 1 (solid, pour order 5): 105,88 125.526,88 125.526,90.65 110.896,90.65 110.896,95 105,95
VIN on Signal Layer 1 (solid, pour order 6): 82,82 94,82 94,98.323 125.479,98.323 125.479,101.184 82,101.184
GND on Signal Layer 2 "Signal Layer 2-GND" (solid, pour order 4): 74,81.27 74,122.23 cw(c75.27,122.23) 75.27,123.5 124.73,123.5 cw(c124.73,122.23) 126,122.23 126,81.27 cw(c124.73,81.27) 124.73,80 75.27,80 cw(c75.27,81.27)
GND on Bottom Copper "Bottom Copper-GND" (solid, pour order 3): 74,81.27 74,122.23 cw(c75.27,122.23) 75.27,123.5 124.73,123.5 cw(c124.73,122.23) 126,122.23 126,81.27 cw(c124.73,81.27) 124.73,80 75.27,80 cw(c75.27,81.27)
GND on Top Copper "Top Copper-GND" (solid, pour order 0): 74,81.27 74,122.23 cw(c75.27,122.23) 75.27,123.5 124.73,123.5 cw(c124.73,122.23) 126,122.23 126,81.27 cw(c124.73,81.27) 124.73,80 75.27,80 cw(c75.27,81.27)

## Keep-outs
Keep-Out Layer:
  the board outline again, w0.025

## Other copper
Signal Layer 2:
  pour cut-out: 113.5,106.5 105.5,106.5 105.5,123.5 113.5,123.5
  pour cut-out: 86.5,106.5 94.5,106.5 94.5,123.5 86.5,123.5

## Silkscreen, mask and mechanical layers (free items; w line width, h text height)
Top Overlay:
  text "2.4GHZ" at 76.504,118.902 h2
  text "SUBGHZ" at 117,118.902 h2
  text "NiceRF LR2021 DevKit" at 80.902,114.601 h2 r270
  text "rev 1.1.0 Mar 21, 26" at 78.902,114.101 h1.5 r270
  text "BAT-" at 78.677,83.229 h2.5
  text "BAT+" at 95.25,83.229 h2.5
  text "JLCJLCJLCJLC" at 112.624,80.402 h1.5
Bottom Overlay:
  text "LED1" at 119.402,112.654 h1.5 r180
  text "LED2" at 119.25,110.119 h1.5 r180
  text "LR_DIO7" at 77.62,110.002 h1.5 r180
  text "LR_DIO8" at 77.62,107.462 h1.5 r180
  text "LR_DIO9" at 77.62,104.923 h1.5 r180
  text "LR_RST" at 77.62,102.382 h1.5 r180
  text "VIN/BAT+" at 116.041,99.891 h1.5 r180
  text "SD_SPI_SS" at 77.62,99.842 h1.5 r180
  text "GND" at 119.581,97.417 h1.5 r180
  text "SD_CARD_DETECTION" at 77.62,95.778 h1.5 r180
  text "GND" at 119.581,94.877 h1.5 r180
  text "LR_SPI_NSS" at 77.62,93.238 h1.5 r180
  text "+5V" at 119.977,92.325 h1.5 r180
  text "LR_BUSY" at 77.62,90.698 h1.5 r180
  text "+3.3V" at 118.889,89.796 h1.5 r180
  text "MOSI" at 77.62,88.273 h1.5 r180
  text "MISO" at 77.62,85.733 h1.5 r180
  text "SCK" at 77.62,83.193 h1.5 r180
Top Mask:
  drawing of 202 lines, arcs and shapes, not listed
  text "UIT-FCE / TTLAB" at 101.452,112.849 h2
Mechanical 1:
  lines w0.025: 86.5,106.5 94.5,106.5 94.5,123.5 86.5,123.5 86.5,106.5
  lines w0.254: 74,81.27 ccw(c75.27,81.27) 75.27,80 ; 74,122.23 cw(c75.27,122.23) 75.27,123.5 ; 124.73,80 ccw(c124.73,81.27) 126,81.27 ; 124.73,123.5 cw(c124.73,122.23) 126,122.23